# EAGLE board card (EAGLE 8.5.0)

Size 85 x 54 mm. Coordinates in mm from the lower left corner, seen from the top.
Outline: 83,0 2,0 arc-90 0,2 0,52 arc-90 2,54 54,54 83,54 arc-90 85,52 85,2 arc-90 83,0
Outline: 10.5,41 arc-61 41,10.5 arc-180 39,10 arc61 10,39 arc-180 10.5,41
Copper layers (1*16): Top 0.035mm / dielectric 1.5mm / Bottom 0.035mm
Design rules "card *": minimum track width 10mil, minimum drill 24mil, track to track 0.205mm, track to pad 0.205mm, pad to pad 0.205mm, via to via 0.205mm, smd to smd 8mil, copper to edge 40mil, drill to drill 8mil, minimum pad ring 10mil, minimum via ring 8mil, stop-mask expansion 0.01mm, vias tented up to drill 0mil, thermal gap 10mil
Holes 2.7 mm at 63.5,36
Holes 3.2 mm at 63.5,30.5
Holes 3.7 mm at 63.5,24.5
Holes 4.2 mm at 63.5,18
Holes 5.2 mm at 63.5,11
Holes 1.2 mm at 63.5,44.5
Holes 5.77 mm at 55.5,13
Holes 4.98 mm at 47,12.5
Holes 4.17 mm at 47,19.5
Holes 3.38 mm at 47,26
Holes 2.59 mm at 47,32
Holes 8.15 mm at 55,40.5
Holes 7.34 mm at 55.5,30.5
Holes 6.55 mm at 55.5,21.5
Holes 10.2 mm at 71.5,42
Holes 8.2 mm at 72,30.5
Holes 7.2 mm at 72.5,20.5
Holes 6.2 mm at 73,11.5
Holes 1.8 mm at 47,37.5
Holes 0.99 mm at 47,42.5
Holes 2.2 mm at 63.5,40.5

## Placement (x,y rotation side)
U$1  [RULER-MM-HORIZ]  0,0 0 top
U$2  [RULER-MM-VERT]  0,0 0 top
U$3  [RULER-IN-HORIZ-REV]  0,0 0 bottom
U$4  [RULER-IN-VERT-REV]  0,0 0 bottom
U$5  [RULER-IN-HORIZ]  85,54 180 top
U$6  [RULER-IN-VERT]  85,54 180 top
U$7  [RULER-MM-HORIZ-REV]  85,54 180 bottom
U$8  [RULER-MM-VERT-REV]  85,54 180 bottom

## Library data of the parts
U$1-U$8 = card

## Tracks (layer width: path | path; a pad name or v marks a point on that pad's centre or on a via)
(copper drawn outside any net)
  shapes: Bottom circle x2, Top circle x2

## Text on the board
Dimension: CUT-OUT | CUT-OUT | CUT-OUT
tPlace: 1 | 10 | 32 | 5/16 | / | 1 | 2 | 16 | / | 2.5 | 1 | 9/32 | 8 | 32 | / | 3 | 1in=2.54cm | 3 | 1ft=0.30m | 1/8 | 1mi=1.61km | 3.5 | 1gal=3.78L | 1/4 | 7 | 1fl-oz=29.57mL | 5/32 | 4 | 1oz=28.35g | 1lb=0.45kg | 7/32 | 1mph=1.61kph | 3/8 | 6 | 5 | (°F-32)(5/9)=°C
bPlace: 24 yotta | 21 zetta | 18 exa | 15 peta | -1 deci | 12 tera | -2 centi | 9 giga | -3 milli | 6 mega | -6 micro | 3 kilo | -9 nano | 2 hecto | -12 pico | 1 deca | -15 femto